# Altium PCB Embeded MCU.PcbDoc
Units mm, origin at the board's own origin, x right, y up, seen from the top; angles counter-clockwise.
Board outline 126.36 x 110.87 mm, 2 copper layers (Top Layer, Bottom Layer), stack 1.569 mm thick; 105 components, 115 nets, 450 pads, 0 vias.
Unrouted connection lines stored in the file: 300.
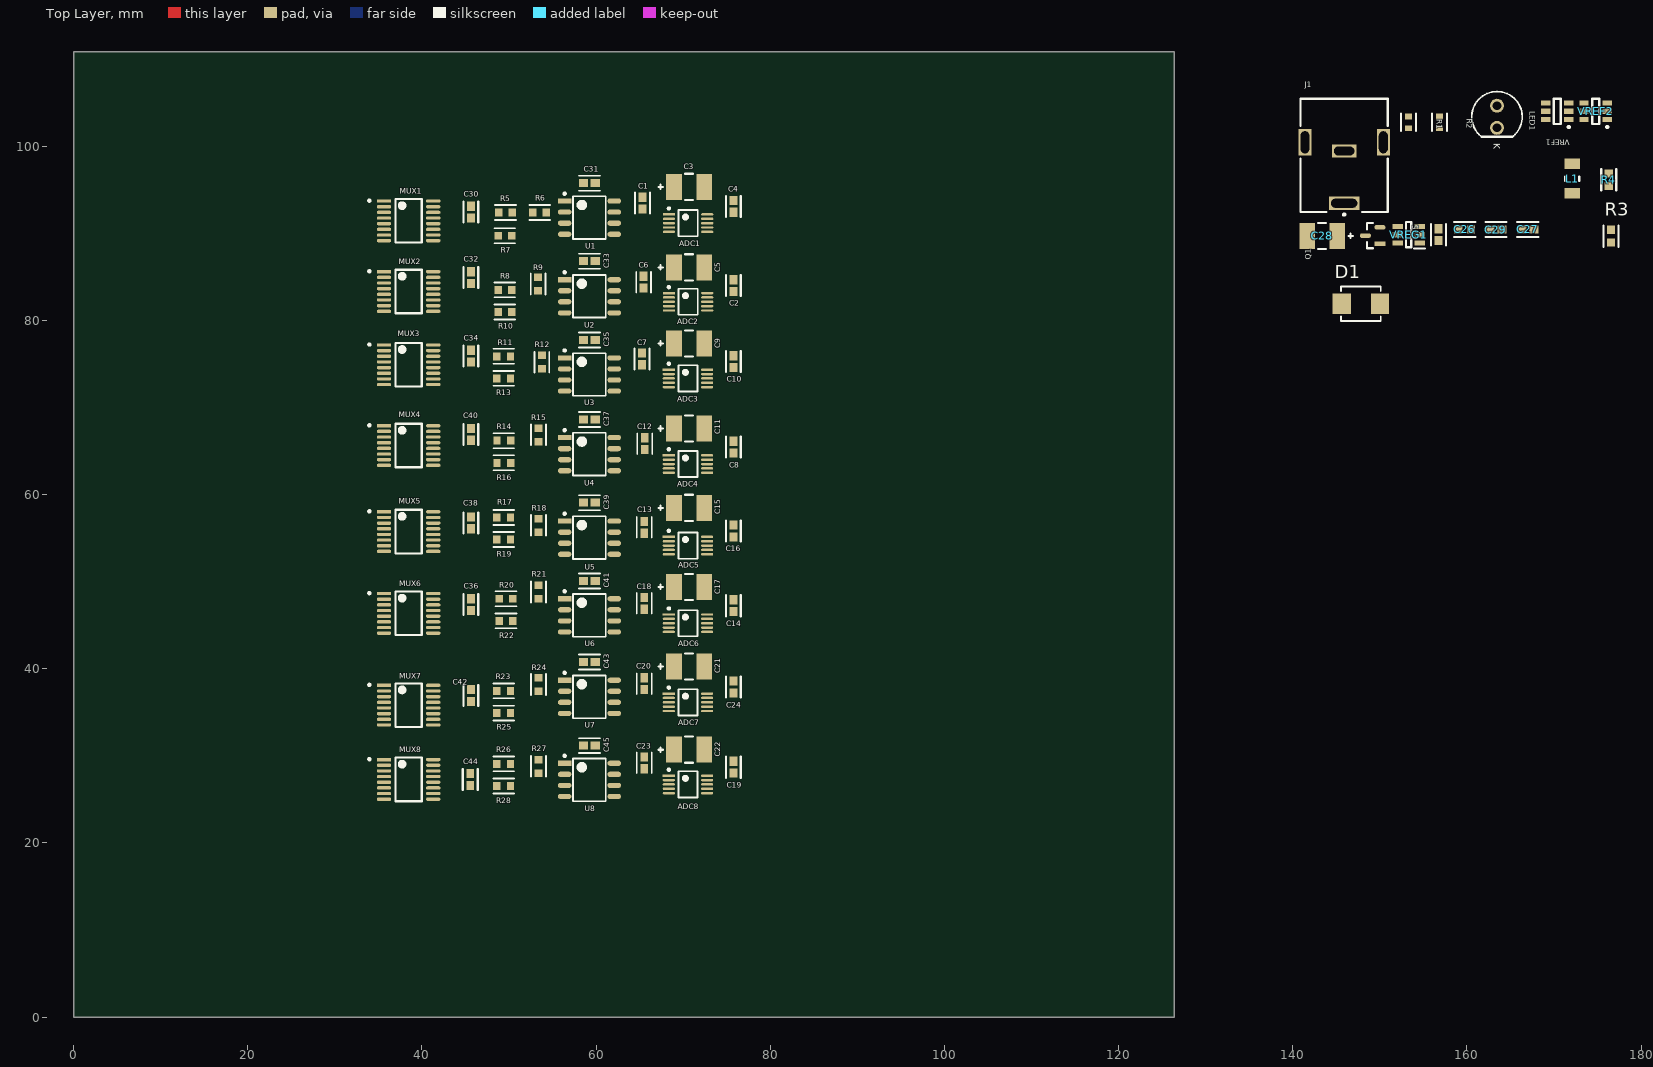
[diagram p0: Top Layer view]
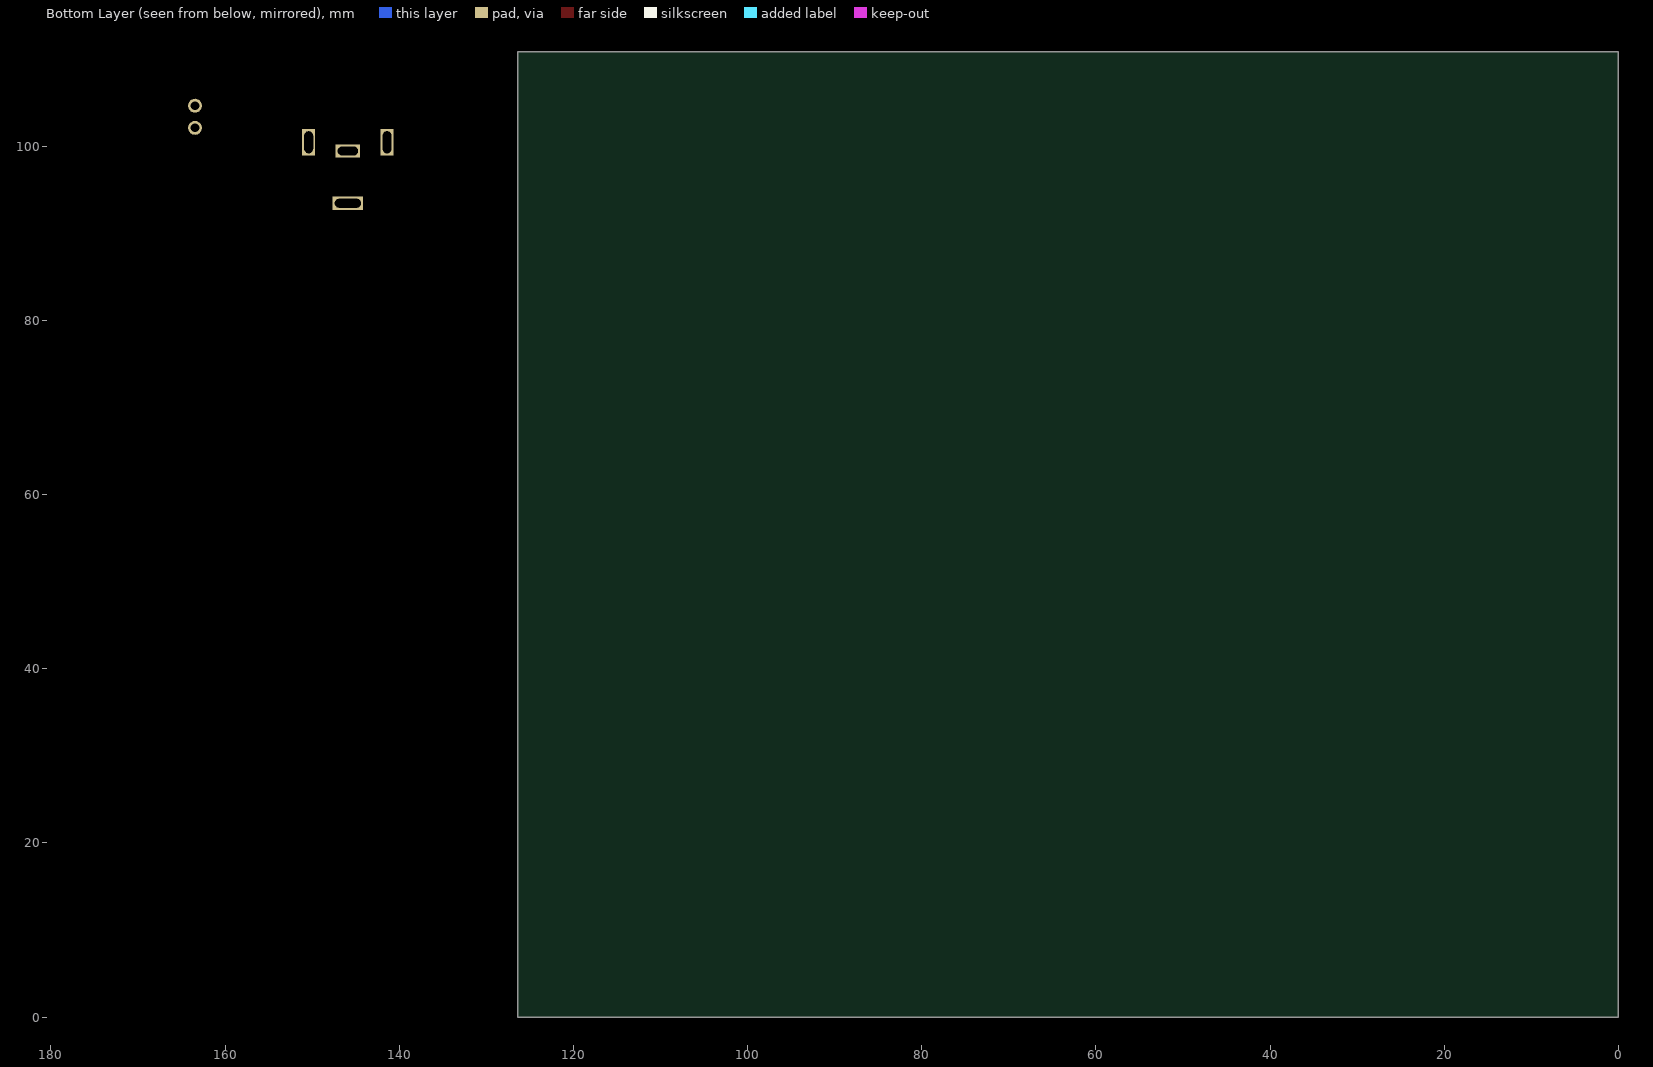
[diagram p1: Bottom Layer view, seen from below]

## Layer stack, top to bottom
Top Solder: solder mask 0.0254, SM-001, Dk 4
Top Layer: signal copper 0.035
Dielectric 1: core 1.4986, Core-043, Dk 4.3
Bottom Layer: signal copper 0.035
Bottom Solder: solder mask 0.0254, SM-001, Dk 4

## Board outline
0,0 0,110.871 126.365,110.871 126.365,0

## Design rules (kind name [scope] priority, off if disabled: settings)
BoardOutlineClearance [All] p1: gap=0.2 ignorepadtopadclearanceinfootprint=FALSE
Clearance [All] p1: gap=0.254 ignorepadtopadclearanceinfootprint=TRUE except(0.127: SMDPad-SMDPad; 0.2: Arc-SMDPad Track-SMDPad; 0.33: Arc-THPad Track-THPad; 0.5: THPad-THPad)
HoleSize [All] p1: absolutevalues=TRUE maxlimit=2.54 minlimit=0.2 maxpercent=80.000 minpercent=20.000
HoleToHoleClearance [All] p1: gap=0.5 allowstackedmicrovias=TRUE
MinimumAnnularRing [All] p1: minimumring=0.2
PolygonConnect [All] p1: connectstyle=Relief reliefconductorwidth=0.254 reliefentries=4 polygonreliefangle="90 Angle" airgapwidth=0.254
RoomDefinition "Power Supply Unit" [InComponentClass('Power Supply Unit')] p1: confinementstyle=ConfineIn formatcopy=TRUE lockcomponents=FALSE outline 138.876,108.605 138.876,60.091 186.247,60.091 186.247,108.605
RoutingVias [All] p1: holewidth=0.3 width=0.7 viastyle="Through Hole" minholewidth=0.2 minwidth=0.5 maxholewidth=0.5 maxwidth=0.9
SolderMaskExpansion [All] p1: expansion=0.102 istentingtop=FALSE
UnRoutedNet [All] p1: checkbadconnections=TRUE
Width [All] p1: maxlimit=0.5 minlimit=0.2 preferedwidth=0.3
27 further rules are at their usual default settings.

## Classes and differential pairs
component class "Weatstone bridge part I": *3 C30 C31 C32 C33 C34 C35 MUX1 MUX2 MUX3 R5 R6 R7 R8 R9 R10 R11 R12 R13 U1 U2 U3
component class "Weatstone bridge part II": *4 C36 C37 C38 C39 C40 C41 MUX4 MUX5 MUX6 R14 R15 R16 R17 R18 R19 R20 R21 R22 U4 U5 U6
component class "Weatstone bridge part III": *5 C42 C43 C44 C45 MUX7 MUX8 R23 R24 R25 R26 R27 R28 U7 U8
component class "Processing interface": *1 ADC1 ADC2 ADC3 ADC4 ADC5 ADC6 ADC7 ADC8 C1 C2 C3 C4 C5 C6 C7 C8 C9 C10 C11 C12 C13 C14 C15 C16 C17 C18 C19 C20 C21 C22 C23 C24
component class "Power Supply Unit": *2 C25 C26 C27 C28 C29 D1 J1 L1 LED1 Q1 R1 R2 R3 R4 VREF1 VREF2 VREG1

## Components (designator, comment, footprint, x,y, rotation, side; value= is the part's Value field where it differs from the comment)
ADC1 "MCP33141-10-E/MS" MCP33141-10-E/MS 70.56,91.17 r0 top
ADC2 "MCP33141-10-E/MS" MCP33141-10-E/MS 70.56,82.139 r0 top
ADC3 "MCP33141-10-E/MS" MCP33141-10-E/MS 70.552,73.343 r0 top
ADC4 "MCP33141-10-E/MS" MCP33141-10-E/MS 70.552,63.508 r0 top
ADC5 "MCP33141-10-E/MS" MCP33141-10-E/MS 70.552,54.145 r0 top
ADC6 "MCP33141-10-E/MS" MCP33141-10-E/MS 70.552,45.231 r0 top
ADC7 "MCP33141-10-E/MS" MCP33141-10-E/MS 70.552,36.147 r0 top
ADC8 "MCP33141-10-E/MS" MCP33141-10-E/MS 70.552,26.719 r0 top
C1 "CC0603KPX7R7BB105" FP-CC0603-DA-IPC_B 65.332,93.476 r270 top value=1uF
C2 "CC0603JRX7R9BB104" FP-CC0603-DA-IPC_B 75.759,84.002 r270 top value=100nF
C3 "293D106X9016B2TE3" FP-293D-B-MFG 70.679,95.337 r180 top value=10uF
C4 "CC0603JRX7R9BB104" FP-CC0603-DA-IPC_B 75.759,93.095 r90 top value=100nF
C5 "293D106X9016B2TE3" FP-293D-B-MFG 70.679,86.093 r180 top value=10uF
C6 "CC0603KPX7R7BB105" FP-CC0603-DA-IPC_B 65.459,84.388 r90 top value=1uF
C7 "CC0603KPX7R7BB105" FP-CC0603-DA-IPC_B 65.278,75.58 r270 top value=1uF
C8 "CC0603JRX7R9BB104" FP-CC0603-DA-IPC_B 75.759,65.455 r270 top value=100nF
C9 "293D106X9016B2TE3" FP-293D-B-MFG 70.679,77.358 r180 top value=10uF
C10 "CC0603JRX7R9BB104" FP-CC0603-DA-IPC_B 75.759,75.272 r90 top value=100nF
C11 "293D106X9016B2TE3" FP-293D-B-MFG 70.679,67.59 r180 top value=10uF
C12 "CC0603KPX7R7BB105" FP-CC0603-DA-IPC_B 65.586,65.845 r90 top value=1uF
C13 "CC0603KPX7R7BB105" FP-CC0603-DA-IPC_B 65.532,56.241 r270 top value=1uF
C14 "CC0603JRX7R9BB104" FP-CC0603-DA-IPC_B 75.759,47.244 r270 top value=100nF
C15 "293D106X9016B2TE3" FP-293D-B-MFG 70.679,58.473 r180 top value=10uF
C16 "CC0603JRX7R9BB104" FP-CC0603-DA-IPC_B 75.759,55.822 r90 top value=100nF
C17 "293D106X9016B2TE3" FP-293D-B-MFG 70.679,49.393 r180 top value=10uF
C18 "CC0603KPX7R7BB105" FP-CC0603-DA-IPC_B 65.532,47.514 r90 top value=1uF
C19 "CC0603JRX7R9BB104" FP-CC0603-DA-IPC_B 75.759,28.694 r270 top value=100nF
C20 "CC0603KPX7R7BB105" FP-CC0603-DA-IPC_B 65.532,38.287 r270 top value=1uF
C21 "293D106X9016B2TE3" FP-293D-B-MFG 70.679,40.259 r180 top value=10uF
C22 "293D106X9016B2TE3" FP-293D-B-MFG 70.679,30.71 r180 top value=10uF
C23 "CC0603KPX7R7BB105" FP-CC0603-DA-IPC_B 65.532,29.194 r90 top value=1uF
C24 "CC0603JRX7R9BB104" FP-CC0603-DA-IPC_B 75.759,37.906 r90 top value=100nF
C25 "CC0603KRX7R5BB225" FP-CC0603-DA-IPC_B 156.725,89.844 r90 top value=2.2uF
C26 "GRM188R71E224KA88D" FP-GRM188-0_1-e0_2_0_5-IPC_B 159.745,90.444 r180 top value=220nF
C27 "CC0603JRX7R9BB104" FP-CC0603-DA-IPC_B 166.985,90.444 r0 top value=100nF
C28 "293D106X9016B2TE3" FP-293D-B-MFG 143.372,89.7 r0 top value=10uF
C29 "CC0603KRX7R5BB225" FP-CC0603-DA-IPC_B 163.329,90.437 r180 top value=2.2uF
C30 "CC0603JRX7R9BB104" FP-CC0603-DA-IPC_B 45.619,92.437 r270 top value=100nF
C31 "CC0603JRX7R9BB104" FP-CC0603-DA-IPC_B 59.236,95.76 r0 top value=100nF
C32 "CC0603JRX7R9BB104" FP-CC0603-DA-IPC_B 45.619,84.921 r270 top value=100nF
C33 "CC0603JRX7R9BB104" FP-CC0603-DA-IPC_B 59.236,86.801 r0 top value=100nF
C34 "CC0603JRX7R9BB104" FP-CC0603-DA-IPC_B 45.619,75.91 r270 top value=100nF
C35 "CC0603JRX7R9BB104" FP-CC0603-DA-IPC_B 59.236,77.756 r0 top value=100nF
C36 "CC0603JRX7R9BB104" FP-CC0603-DA-IPC_B 45.619,47.364 r270 top value=100nF
C37 "CC0603JRX7R9BB104" FP-CC0603-DA-IPC_B 59.236,68.631 r0 top value=100nF
C38 "CC0603JRX7R9BB104" FP-CC0603-DA-IPC_B 45.619,56.755 r270 top value=100nF
C39 "CC0603JRX7R9BB104" FP-CC0603-DA-IPC_B 59.235,59.069 r0 top value=100nF
C40 "CC0603JRX7R9BB104" FP-CC0603-DA-IPC_B 45.619,66.913 r270 top value=100nF
C41 "CC0603JRX7R9BB104" FP-CC0603-DA-IPC_B 59.235,50.072 r0 top value=100nF
C42 "CC0603JRX7R9BB104" FP-CC0603-DA-IPC_B 45.619,36.933 r270 top value=100nF
C43 "CC0603JRX7R9BB104" FP-CC0603-DA-IPC_B 59.235,40.773 r0 top value=100nF
C44 "CC0603JRX7R9BB104" FP-CC0603-DA-IPC_B 45.55,27.285 r270 top value=100nF
C45 "CC0603JRX7R9BB104" FP-CC0603-DA-IPC_B 59.235,31.18 r0 top value=100nF
D1 "SMBJ20CA" FP-SMBJ-CA-MFG 147.828,81.915 r0 top
J1 "PJ-063AH" CUI-PJ-063AH_V 145.898,99.458 r90 top
L1 "ILSB1206ER4R7K" INDC3216X14N 172.092,96.279 r270 top value=4.7uH
LED1 "151053GS03000" "Type 5mm" 163.452,103.386 r270 top
MUX1 "TMUX1208PWR" FP-PW0016A-IPC_B 38.473,91.435 r0 top
MUX2 "TMUX1208PWR" FP-PW0016A-IPC_B 38.473,83.323 r0 top
MUX3 "TMUX1208PWR" FP-PW0016A-IPC_B 38.473,74.908 r0 top
MUX4 "TMUX1208PWR" FP-PW0016A-IPC_B 38.473,65.633 r0 top
MUX5 "TMUX1208PWR" FP-PW0016A-IPC_B 38.473,55.753 r0 top
MUX6 "TMUX1208PWR" FP-PW0016A-IPC_B 38.473,46.362 r0 top
MUX7 "TMUX1208PWR" FP-PW0016A-IPC_B 38.473,35.822 r0 top
MUX8 "TMUX1208PWR" FP-PW0016A-IPC_B 38.473,27.295 r0 top
Q1 "IRLML9303TRPBF" FP-Micro3-IPC_C 149.177,89.74 r180 top
R1 "AC0603FR-072K4L" FP-AC0603-IPC_C 153.287,102.754 r270 top value=2.4kR
R2 "AC0603FR-075K1L" FP-AC0603-IPC_C 156.853,102.754 r270 top value=5.1kR
R3 "CRCW060322K1FKEA" CRCW060322K1FKEA-Footprint-2 176.537,89.675 r270 top value=22K1
R4 "CRCW060388K7FKEB" FP-CRCW0603-e3-IPC_B 176.283,96.152 r90 top value=88K7
R5 "RT0603BRD0710KL" FP-RT0603-IPC_B 49.584,92.39 r0 top value=10K
R6 "RT0603BRD0710KL" FP-RT0603-IPC_B 53.521,92.39 r0 top value=10K
R7 "RT0603BRD0710KL" FP-RT0603-IPC_B 49.522,89.726 r0 top value=10K
R8 "RT0603BRD0710KL" FP-RT0603-IPC_B 49.522,83.509 r0 top value=10K
R9 "RT0603BRD0710KL" FP-RT0603-IPC_B 53.34,84.186 r90 top value=10K
R10 "RT0603BRD0710KL" FP-RT0603-IPC_B 49.522,80.969 r0 top value=10K
R11 "RT0603BRD0710KL" FP-RT0603-IPC_B 49.395,75.883 r0 top value=10K
R12 "RT0603BRD0710KL" FP-RT0603-IPC_B 53.775,75.206 r90 top value=10K
R13 "RT0603BRD0710KL" FP-RT0603-IPC_B 49.395,73.343 r0 top value=10K
R14 "RT0603BRD0710KL" FP-RT0603-IPC_B 49.396,66.19 r0 top value=10K
R15 "RT0603BRD0710KL" FP-RT0603-IPC_B 53.385,66.866 r90 top value=10K
R16 "RT0603BRD0710KL" FP-RT0603-IPC_B 49.396,63.65 r0 top value=10K
R17 "RT0603BRD0710KL" FP-RT0603-IPC_B 49.395,57.378 r0 top value=10K
R18 "RT0603BRD0710KL" FP-RT0603-IPC_B 53.393,56.473 r90 top value=10K
R19 "RT0603BRD0710KL" FP-RT0603-IPC_B 49.395,54.838 r0 top value=10K
R20 "RT0603BRD0710KL" FP-RT0603-IPC_B 49.642,48.041 r0 top value=10K
R21 "RT0603BRD0710KL" FP-RT0603-IPC_B 53.393,48.817 r90 top value=10K
R22 "RT0603BRD0710KL" FP-RT0603-IPC_B 49.642,45.501 r0 top value=10K
R23 "RT0603BRD0710KL" FP-RT0603-IPC_B 49.395,37.458 r0 top value=10K
R24 "RT0603BRD0710KL" FP-RT0603-IPC_B 53.393,38.194 r90 top value=10K
R25 "RT0603BRD0710KL" FP-RT0603-IPC_B 49.395,34.902 r0 top value=10K
R26 "RT0603BRD0710KL" FP-RT0603-IPC_B 49.395,29.074 r0 top value=10K
R27 "RT0603BRD0710KL" FP-RT0603-IPC_B 53.393,28.794 r90 top value=10K
R28 "RT0603BRD0710KL" FP-RT0603-IPC_B 49.395,26.534 r0 top value=10K
U1 "MCP6N11-100E/SN" MCP6N11-100E/SN 59.236,91.805 r0 top
U2 "MCP6N11-100E/SN" MCP6N11-100E/SN 59.236,82.774 r0 top
U3 "MCP6N11-100E/SN" MCP6N11-100E/SN 59.236,73.794 r0 top
U4 "MCP6N11-100E/SN" MCP6N11-100E/SN 59.236,64.643 r0 top
U5 "MCP6N11-100E/SN" MCP6N11-100E/SN 59.235,55.05 r0 top
U6 "MCP6N11-100E/SN" MCP6N11-100E/SN 59.235,46.136 r0 top
U7 "MCP6N11-100E/SN" MCP6N11-100E/SN 59.235,36.782 r0 top
U8 "MCP6N11-100E/SN" MCP6N11-100E/SN 59.235,27.243 r0 top
VREF1 "MCP1501T-33E/CHY" SOT95P280X118-6N 170.372,104.008 r180 top
VREF2 "MCP1501T-18E/CHY" MCP1501T-18E/CHY 174.784,104.008 r180 top
VREG1 "LMR50410YFQDBVRQ1" SOT95P280X145-6N 153.309,89.85 r180 top

## Footprints (in the part's own frame and the unit in brackets; to place one, negate y for a bottom-side part, rotate by r counter-clockwise, add the part's x,y. Pads: shape width x height; smd on the part's side, far side on the other; paste and mask are expansions set on the pad)
CRCW060322K1FKEA-Footprint-2 [mm]
  rect 0.958x0.912 smd paste+0 mask+0: 1(-0.727,0) 2(0.727,0)
  silkscreen extent -1.21,-0.86 1.21,0.86, body extent -1.46,-0.71 1.46,0.71, height 0.25
CUI-PJ-063AH_V [mm] "THD, 2-Leads, Body 13x10mm, Height 9mm"
  rect 1.5x3.5 hole 1 slot 3 at 90 deg: 1(-6,0)
  rect 1.5x2.8 hole 1 slot 2.3 at 90 deg: 2(0,0)
  rect 3x1.5 hole 1 slot 2.5 at 0 deg: 3(1,4.5) 4(1,-4.5)
  round 1.4 hole 1.7 unplated: 5(3,0)
  silkscreen extent -7.42,-5 6,5, body extent -7,-5.15 6,5.15, height 9
FP-293D-B-MFG [mm]
  rect 1.8x3 smd paste+0 mask+0: 1(-1.725,0) 2(1.725,0)
  silkscreen extent -0.45,-1.5 3.52,1.5, body extent -2.73,-1.6 2.73,1.6, height 0.25
FP-AC0603-IPC_C [mm]
  rect 0.659x0.812 smd paste+0 mask+0: 1(-0.677,0) 2(0.677,0)
  silkscreen extent -1.01,-0.85 1.01,0.85, body extent -1.11,-0.55 1.11,0.55, height 0.25
FP-CC0603-DA-IPC_B [mm]
  rect 1.058x0.912 smd paste+0 mask+0: 1(-0.677,0) 2(0.677,0)
  silkscreen extent -1.21,-0.86 1.21,0.86, body extent -1.46,-0.71 1.46,0.71, height 0.25
FP-CRCW0603-e3-IPC_B [mm]
  rect 0.935x0.962 smd paste+0 mask+0: 1(-0.715,0) 2(0.715,0)
  silkscreen extent -1.21,-0.86 1.21,0.86, body extent -1.43,-0.73 1.43,0.73, height 0.25
FP-GRM188-0_1-e0_2_0_5-IPC_B [mm]
  rect 0.959x0.912 smd paste+0 mask+0: 1(-0.727,0) 2(0.727,0)
  silkscreen extent -1.21,-0.86 1.21,0.86, body extent -1.46,-0.71 1.46,0.71, height 0.25
FP-Micro3-IPC_C [mm]
  rect 1.274x0.532 smd paste+0 mask+0: 1(-0.835,0.95)
  rrect100% 1.274x0.532 smd paste+0 mask+0: 2(-0.835,-0.95) 3(0.835,0)
  silkscreen extent 0,-1.46 0.65,1.46, body extent -1.57,-1.56 1.57,1.56, height 0.25
FP-PW0016A-IPC_B [mm]
  rect 1.655x0.381 smd paste+0 mask+0: 1(-2.825,2.275)
  rrect100% 1.655x0.381 smd paste+0 mask+0: 2(-2.825,1.625) 3(-2.825,0.975) 4(-2.825,0.325) 5(-2.825,-0.325) 6(-2.825,-0.975) 7(-2.825,-1.625) 8(-2.825,-2.275) 9(2.825,-2.275) 10(2.825,-1.625) 11(2.825,-0.975) 12(2.825,-0.325) 13(2.825,0.325) 14(2.825,0.975) 15(2.825,1.625) 16(2.825,2.275)
  silkscreen extent -4.63,-2.5 1.5,2.5, body extent -3.9,-2.75 3.9,2.75, height 0.25
FP-RT0603-IPC_B [mm]
  rect 0.859x0.912 smd paste+0 mask+0: 1(-0.777,0) 2(0.777,0)
  silkscreen extent -1.21,-0.86 1.21,0.86, body extent -1.46,-0.71 1.46,0.71, height 0.25
FP-SMBJ-CA-MFG [mm]
  rect 2.1x2.4 smd paste+0 mask+0: 1(-2.2,0) 2(2.2,0)
  silkscreen extent -2.28,-1.97 2.28,1.97, body extent -2.72,-2.07 2.72,2.07, height 0.25
INDC3216X14N [mm] "Chip Inductor, 2-Leads, Body 3,20x1,60mm, IPC Medium Density"
  rect 1.2x1.8 smd: 1(-1.7,0) 2(1.7,0)
  silkscreen extent -0.25,-0.8 0.25,0.8, body extent -1.7,-0.9 1.7,0.9, height 1.4
MCP6N11-100E/SN [mm] "SOIC, 8-Leads, Body 4,90x3,90mm, Pitch 1,27mm, IPC Medium Density"
  rect 1.55x0.6 smd: 1(-2.85,1.905)
  oval 1.55x0.6 smd: 2(-2.85,0.635) 3(-2.85,-0.635) 4(-2.85,-1.905) 5(2.85,-1.905) 6(2.85,-0.635) 7(2.85,0.635) 8(2.85,1.905)
  silkscreen extent -2.97,-2.45 1.88,2.88, body extent -3,-2.45 3,2.45, height 1.75
MCP1501T-18E/CHY [mm] "SOT23, 6-Leads, Body 2,90x2,80mm, Pitch 0,95mm, IPC Medium Density"
  rect 1.05x0.6 smd: 1(-1.325,0.95) 2(-1.325,0) 3(-1.325,-0.95) 4(1.325,-0.95) 5(1.325,0) 6(1.325,0.95)
  silkscreen extent -1.45,-1.45 0.4,1.92, body extent -1.4,-1.45 1.4,1.45, height 1.17
MCP33141-10-E/MS [mm] "TSSOP, 10-Leads, Body 3,00x3,00mm, Pitch 0,50mm, IPC Low Density"
  rect 1.4x0.28 smd: 1(-2.2,1)
  oval 1.4x0.28 smd: 2(-2.2,0.5) 3(-2.2,0) 4(-2.2,-0.5) 5(-2.2,-1) 6(2.2,-1) 7(2.2,-0.5) 8(2.2,0) 9(2.2,0.5) 10(2.2,1)
  silkscreen extent -2.32,-1.5 1.1,1.81, body extent -2.45,-1.5 2.45,1.5, height 1.1
SOT95P280X118-6N [mm] "SOT23, 6-Leads, Body 2,90x2,80mm, Pitch 0,95mm, IPC Medium Density"
  rect 1.05x0.6 smd: 1(-1.325,0.95) 2(-1.325,0) 3(-1.325,-0.95) 4(1.325,-0.95) 5(1.325,0) 6(1.325,0.95)
  silkscreen extent -1.45,-1.45 0.4,1.92, body extent -1.4,-1.45 1.4,1.45, height 1.17
SOT95P280X145-6N [mm]
  rect 1.2x0.6 smd: 1(-1.25,0.95) 2(-1.25,0) 3(-1.25,-0.95) 4(1.25,-0.95) 5(1.25,0) 6(1.25,0.95)
  silkscreen extent -1.85,-1.45 0.3,1.6, body extent -1.4,-1.45 1.4,1.45, height 1.45
"Type 5mm" [mm] "THT, LED-5mm, 2pin- Body 5.8mm"
  round 1.6 hole 1: 1(1.27,0) 2(-1.27,0)
  silkscreen extent -2.9,-2.9 2.29,2.9, body extent -2.9,-2.9 2.5,2.9, height 11.7

## Part data
ADC1 ADC2 ADC3 ADC4 ADC5 ADC6 ADC7 ADC8: library part CMP-020-00028-10, "ADC Single SAR 1Msps 12-bit Serial Microwire/SPI 10-Pin MSOP Tray", Architecture=SAR, Data Interface=SPI, Resolution="12 Bits", Sampling rate=1M
C1 C6 C7 C12 C13 C18 C20 C23: library part CMP-001-00101-1, "0603 1 uF 16 V ±10 % Tolerance X7R SMT Multilayer Ceramic Capacitor", Case Code (Imperial)=0603, Case Code (Metric)=1608, Dielectric=X7R, Max Operating Temperature=125°C, Min Operating Temperature=-55°C, Resistor Type=Ceramic, Tolerance=10%, Voltage Rating (DC)=16V, Case/Package=0603, Construction=Flat, Depth=0.8mm, Halogen Free="Halogen Free", Height=0.8mm, Lead Free="Lead Free", Length=1.6mm, Mounting Technology="Surface Mount", Packaging="Tape and Reel", Radiation Hardening=No, RoHS Compliant=Yes, Termination=SMD/SMT, Weight=7.1E-05oz
C2 C4 C8 C10 C14 C16 C19 C24 C27 C30 C31 C32 C33 C34 C35 C36 C37 C38 C39 C40 C41 C42 C43 C44 C45: library part CMP-001-00097-1, "0603 0.1 uF 50 V ±5 % Tolerance X7R SMT Multilayer Ceramic Capacitor", Case Code (Imperial)=0603, Case Code (Metric)=1608, Dielectric=X7R, Max Operating Temperature=125°C, Min Operating Temperature=-55°C, Resistor Type=Ceramic, Tolerance=5%, Voltage Rating=50V, Case/Package=0603, Construction=Flat, Depth=0.8mm, Halogen Free="Halogen Free", Height=0.8mm, Lead Free="Lead Free", Length=0.063inch, Mounting Technology="Surface Mount", Packaging="Tape and Reel", Pins=2, Radiation Hardening=No, RoHS Compliant=Yes, Series=CC, Termination=SMD/SMT, Thickness=0.035inch, Voltage Rating (DC)=50V, Weight=7.1E-05oz, Width=0.031inch
C3 C5 C9 C11 C15 C17 C21 C22 C28: library part CMP-001-00090-1, "Cap Tant Solid 10uF 16V B CASE 10% (3.5 X 2.8 X 1.9mm) Inward L SMD 3528-21 2 Ohm 125C T/R", Case Code (Imperial)=1411, Case Code (Metric)=3528, Dielectric Material=Tantalum, ESR (Equivalent Series Resistance)=2R, Leakage Current=1.6uA, Max Operating Temperature=125°C, Min Operating Temperature=-55°C, Package Quantity=2000, Ripple Current=160mA, Tolerance=10%, Voltage=16V, Case/Package=1411, Construction=Flat, Depth=2.8mm, Dissipation Factor=6%, Features="General Purpose", Height=1.9mm, Height - Seated (Max)=0.083inch, Lead Free="Lead Free", Length=3.5mm, Mounting Technology="Surface Mount,PCB", Packaging="Tape and Reel", Polarity=Polar, Q Factor=6, Radiation Hardening=No, RoHS Compliant=Yes, Series="TANTAMOUNT®, 293D", Termination=SMD/SMT, Voltage Rating=16V, Voltage Rating (DC)=16V, Width=1.9mm
C25 C29: library part CMP-001-00098-1, "MLCC- CAPACITANCE 225", Case Code (Imperial)=0603, Case Code (Metric)=1608, Dielectric=X7R, Max Operating Temperature=125°C, Min Operating Temperature=-55°C, Resistor Type=Ceramic, Tolerance=10%, Voltage Rating=6.3V, Case/Package=0603, Construction=Flat, Depth=0.8mm, Halogen Free="Halogen Free", Height=0.8mm, Lead Free="Lead Free", Length=0.063inch, Mounting Technology="Surface Mount", Packaging="Tape and Reel", Radiation Hardening=No, RoHS Compliant=Yes, Series=CC, Termination=SMD/SMT, Thickness=0.035inch, Voltage Rating (DC)=6.3V, Weight=7.1E-05oz, Width=0.031inch
C26: library part CMP-001-00102-1, "0603 0.22 uF 25 V ±10% Tolerance X7R SMT Multilayer Ceramic Capacitor", Case Code (Imperial)=0603, Case Code (Metric)=1608, Dielectric=X7R, Max Operating Temperature=125°C, Min Operating Temperature=-55°C, Package Quantity=1, Tolerance=10%, Voltage=25V, Case/Package=0603, Construction=Flat, Depth=0.8mm, Height=0.8mm, Lead Free="Lead Free", Length=1.6mm, Material=Ceramic, Mounting Technology="Surface Mount", Packaging="Tape and Reel", Pins=2, Radiation Hardening=No, Reach SVHC Compliant=Yes, RoHS Compliant=Yes, Series=GRM, Termination=SMD/SMT, Thickness=0.035inch, Voltage Rating=25V, Voltage Rating (DC)=25V, Width=0.031inch
D1: library part CMP-004-00035-3, "Dio Tvs Vwm 20V 600W Bidir Smb Rohs Compliant: Yes", Breakdown Voltage=25.5V, Case/Package=DO-214AA, Clamping Voltage=32.4V, Leakage Current=5uA, Max Operating Temperature=150°C, Max Power Dissipation=600W, Max Surge Current=100A, Min Breakdown Voltage=22.2V, Min Operating Temperature=-55°C, Operating Supply Voltage=3.5V, Package Quantity=1, Peak Pulse Current=18.6A, Power Line Protection=No, Resistor Type=Zener, Reverse Standoff Voltage=20V, Test Current=1mA, Diode Type=ZENER, Direction=Bidirectional, Element Configuration=Single, Max Breakdown Voltage=25.5V, Max Reverse Leakage Current=5uA, Mounting Technology="Surface Mount", Number of Bidirectional Channels=1, Number of Channels=1, Number of Elements=1, Packaging="Tape and Reel", Peak Pulse Power=600W, Pins=2, Polarity=Bidirectional, Radiation Hardening=No, Reach SVHC Compliant=Yes, Reverse Breakdown Voltage=22.2V, RoHS Compliant=Yes, Series=SMBJ, Termination=SMD/SMT
J1: library part CMP-002-00079-1, "2.0 x 6.5 mm, 8.0 A, Horizontal, Through Hole, Shielded, Kinked Pins, Dc Power Jack Connector", Current Rating=8A, Flammability Rating="UL94 V-0", Housing Color=Black, Insulation Resistance=100MR, Max Operating Temperature=85°C, Min Operating Temperature=-25°C, Package Quantity=500, Voltage Rating=24V, Connector Type=Jack, Contact Gender=Male, Contact Material=Copper, Contact Plating=Nickel, Gender=Male, Housing Material=Thermoplastic, Lead Free="Lead Free", Mounting Technology="Through Hole", Number of Conductors=2, Orientation=Horizontal, RoHS Compliant=Yes, Series=-, Shielding=Shielded, Termination="Through Hole"
L1: library part CMP-006-00022-1, "Inductor RF Chip Shielded Multi-Layer 4.7uH 10% 10MHz 45Q-Factor 50mA 900mOhm DCR 1206 T/R", Case Code (Imperial)=1206, Case Code (Metric)=3216, Current Rating=50mA, DC Resistance (DCR)=900mR, Max Operating Temperature=125°C, Min Operating Temperature=-55°C, Package Quantity=3000, Self Resonant Frequency=41MHz, Test Frequency=10MHz, Tolerance=10%, Case/Package=1206, Core Material=Ferrite, Depth=1.8mm, Height=1.1mm, Height - Seated (Max)=0.055inch, Lead Free="Lead Free", Length=0.126inch, Max DC Current=50mA, Mounting Technology="Surface Mount", Packaging="Tape and Reel", Q Factor=45, Radiation Hardening=No, RoHS Compliant=Yes, Series=ILSB-1206, Shielding=Shielded, Termination=SMD/SMT, Weight=0.000353oz, Width=1.6mm
LED1: library part CMP-007-00044-1, "Led, Green, T-1 3/4 (5Mm), 522 Nm, 3.4 V, 30 Ma, 10 Cd Rohs Compliant: Yes", Case/Package=Radial, Color=Green, Forward Current=30mA, Forward Voltage=3.4V, Lens Color=Colorless, Max Operating Temperature=85°C, Min Operating Temperature=-40°C, Package Quantity=1, Test Current=20mA, Dominant Wavelength=522nm, Height=8.85mm, Lens Size=5mm, Lens Style=Round,Domed,Circular, Lens Transparency=Clear, Luminous Intensity=10000mcd, Mounting Technology="Through Hole", Packaging=Bulk, RoHS Compliant=Yes, Series=WL-TMRW, Viewing Angle=30°, Wavelength=522nm
MUX1 MUX2 MUX3 MUX4 MUX5 MUX6 MUX7 MUX8: library part CMP-015-00012-1, "5-V, 8: 1, 1-channel general-purpose analog multiplexer with 1.8-V input logic 16-TSSOP -40 to 125", RoHS Compliant=Yes
Q1: library part CMP-013-00037-1, "-30V Single P-Channel HEXFET Power MOSFET in a Micro3 package, SOT23-3, RoHS", Case/Package=SOT-23, Continuous Drain Current (ID)=2.3A, Drain to Source Resistance=270mR, Drain to Source Voltage (Vdss)=-30V, Gate to Source Voltage (Vgs)=20V, Input Capacitance=160pF, Max Operating Temperature=150°C, Max Power Dissipation=1.25W, Min Operating Temperature=-55°C, Threshold Voltage=-1.3V, Element Configuration=Single, Halogen Free="Halogen Free", Height=0.04inch, Lead Free="Lead Free", Length=0.119inch, Max Dual Supply Voltage=-30V, Mounting Technology="Surface Mount", Packaging="Cut Tape", Pins=3, Power Dissipation=1.25W, Rds On Max=165mR, Reach SVHC Compliant=Yes, Rise Time=14ns, RoHS Compliant=Yes, Series=HEXFET®, Turn-Off Delay Time=9ns, Turn-On Delay Time=7.5ns, Width=0.055inch
R1: library part CMP-009-00195-2, "Res Thick Film 0603 2.4K Ohm 1% 0.1W(1/10W) ±100ppm/C Pad SMD Automotive T/R", Case Code (Imperial)=0603, Case Code (Metric)=1608, Max Operating Temperature=155°C, Max Power Dissipation=100mW, Min Operating Temperature=-55°C, Ratings=AEC-Q200, Resistor Type="Thick Film", Temperature Coefficient=100ppm/°C, Tolerance=1%, Voltage Rating=50V, Case/Package=0603, Features="Moisture Resistant,Automotive AEC-Q200", Height=0.022inch, Length=0.063inch, Number of Terminations=2, Packaging="Tape and Reel", Power Rating=100mW, RoHS Compliant=Yes, Series=AC, Termination=SMD/SMT, Weight=7.1E-05oz, Width=0.8mm
R2: library part CMP-009-00196-1, "Res Thick Film 0603 5.1K Ohm 1% 1/10W ±100ppm/°C Molded SMD Paper T/R", Case Code (Imperial)=0603, Case Code (Metric)=1608, Max Operating Temperature=155°C, Max Power Dissipation=100mW, Min Operating Temperature=-55°C, Ratings=AEC-Q200, Resistor Type="Thick Film", Temperature Coefficient=100ppm/°C, Tolerance=1%, Voltage Rating=50V, Case/Package=0603, Features="Moisture Resistant,Automotive AEC-Q200", Height=0.45mm, Length=1.6mm, Number of Terminations=2, Packaging="Tape and Reel", Power Rating=100mW, RoHS Compliant=Yes, Series=AC, Termination=SMD/SMT, Weight=7.1E-05oz, Width=0.8mm
R3: library part CMP-009-00200-2, "Res Thick Film 0603 22.1K Ohm 1% 1/10W ±100ppm/°C Molded SMD SMD Paper T/R", Case Code (Imperial)=0603, Case Code (Metric)=1608, Max Operating Temperature=155°C, Max Power Dissipation=100mW, Min Operating Temperature=-55°C, Package Quantity=10, Ratings=AEC-Q200, Resistance Tolerance=1%, Resistor Type="Thick Film", Temperature Coefficient=100ppm/°C, Voltage Rating=75V, Case/Package=0603, Construction=Rectangular, Contact Plating=Tin, Depth=0.85mm, Features="Automotive AEC-Q200", Height=0.45mm, Lead Free="Lead Free", Length=1.55mm, Military Standard=Not, Mounting Technology="Surface Mount", Number of Terminations=2, Packaging="Tape and Reel", Power Rating=100mW, Radiation Hardening=No, RoHS Compliant=Yes, Series=CRCW, Technology="THICK FILM", Termination=SMD/SMT, Tolerance=1%, Voltage Rating (DC)=75V, Weight=7.1E-05oz, Width=0.033inch
R4: library part CMP-009-00199-2, "D11/CRCW0603 100 88K7 1% ET5 e3", Case Code (Imperial)=0603, Case Code (Metric)=1608, Max Operating Temperature=155°C, Max Power Dissipation=100mW, Min Operating Temperature=-55°C, Package Quantity=10000, Resistor Type="Thick Film", Temperature Coefficient=100ppm/°C, Tolerance=1%, Voltage Rating=75V, Case/Package=0603, Construction=Rectangular, Depth=0.85mm, Features="Automotive AEC-Q200", Height=0.02inch, Lead Free="Lead Free", Length=0.061inch, Military Standard=Not, Number of Terminations=2, Packaging="Tape and Reel", Power Rating=100mW, RoHS Compliant=Yes, Series=CRCW, Termination=SMD/SMT, Weight=7.1E-05oz, Width=0.85mm
R5 R6 R7 R8 R9 R10 R11 R12 R13 R14 R15 R16 R17 R18 R19 R20 R21 R22 R23 R24 R25 R26 R27 R28: library part CMP-009-00178-1, "Res High precision Thin Film 0603 10K Ohm 0.1% 1/10W ±25ppm/°C Molded SMD Paper T/R", Case Code (Imperial)=0603, Case Code (Metric)=1608, Max Operating Temperature=155°C, Max Power Dissipation=100mW, Min Operating Temperature=-55°C, Package Quantity=5000, Resistor Type="Thin Film", Temperature Coefficient=25ppm/°C, Voltage Rating=75V, Case/Package=0603, Construction=Rectangular, Depth=0.8mm, Features="Moisture Resistant", Height=0.022inch, Lead Free="Lead Free", Length=0.063inch, Military Standard=Not, Number of Terminations=2, Packaging="Tape and Reel", Power Rating=100mW, RoHS Compliant=Yes, Series=RT, Technology="THIN FILM", Termination=SMD/SMT, Voltage Rating (DC)=75V, Weight=7.1E-05oz, Width=0.8mm, Working Voltage=75V
U1 U2 U3 U4 U5 U6 U7 U8: library part CMP-014-00010-7, "MCP6N11 Series Single Channel 500 KHz 5.5 V Instrumentation Amplifier - SOIC-8", Case/Package=SOIC, Input Bias Current=10pA, Input Offset Voltage (Vos)=350uV, Max Operating Temperature=125°C, Max Supply Current=800uA, Max Supply Voltage=5.5V, Min Operating Temperature=-40°C, Min Supply Voltage=1.8V, Package Quantity=100, Power Supply Rejection Ratio (PSRR)=86dB, Bandwidth=500kHz, Common Mode Rejection Ratio=86dB, Gain Bandwidth Product=35MHz, Height=1.25mm, Input Offset Voltage-Max=350uV, Lead Free="Lead Free", Length=4.9mm, Mounting Technology="Surface Mount", Nominal Supply Current=800uA, Number of Amplifiers=1, Number of Channels=1, Number of Circuits=1, Number of Elements=2, Packaging=Rail/Tube, Pins=8, Radiation Hardening=No, Reach SVHC Compliant=Yes, RoHS Compliant=Yes, Slew Rate=6V/µs, Slew Rate-Nom=9V/µs, Supply Current=800uA, Unity Gain Bandwidth Product=35MHz, Width=3.9mm
VREF1: library part CMP-019-00066-2, "V-Ref Precision 3.3V 20mA 6-Pin SOT-23 T/R", Case/Package=SOT-23-6, Max Operating Temperature=125°C, Min Operating Temperature=-40°C, Min Output Voltage=3.3V, Operating Supply Current=550uA, Output Current=20mA, Temperature Coefficient=50ppm/°C, Tolerance=0.08%, Mounting Technology="Surface Mount", Output Type=Fixed, Packaging="Cut Tape", Reference Type=Series, RoHS Compliant=Yes, Series=-
VREF2: library part CMP-019-00064-2, "MCP1501 Series 1.8 V 20 mA High Precision Buffered Voltage Reference SOT-23-6", Case/Package=SOT-23-6, Max Operating Temperature=125°C, Min Operating Temperature=-40°C, Min Output Voltage=1.8V, Operating Supply Current=550uA, Output Current=20mA, Temperature Coefficient=50ppm/°C, Tolerance=0.08%, Mounting Technology="Surface Mount", Output Type=Fixed, Packaging="Cut Tape", Reference Type=Series, RoHS Compliant=Yes, Series=-
VREG1: "Power Supply", Manufacturer_Name="Texas Instruments", Mouser Part Number=595-MR50410YFQDBVRQ1, Supplier Part Number 1=296-LMR50410YFQDBVRQ1CT-ND, Arrow Part Number=LMR50410YFQDBVRQ1, Arrow Price/Stock=https://www.arrow.com/en/products/lmr50410yfqdbvrq1/texas-instruments?region=nac, Datasheet Link=https://www.ti.com/product/LMR50410-Q1, Height=1.45mm, Manufacturer_Part_Number=LMR50410YFQDBVRQ1, Mouser Price/Stock=https://www.mouser.co.uk/ProductDetail/Texas-Instruments/LMR50410YFQDBVRQ1?qs=81r%252BiQLm7BRUAgUFqYZycA%3D%3D, Supplier 1=Digi-Key

## Nets (pads, with @x,y where several pads share a name; then routed paths per layer and width w, separated by ;. In a path a pad name is that pad's centre, name@x,y a point inside that pad or via, vN(x,y) a via of type N, cw(c..) or ccw(c..) an arc to the next point about the centre after c; other vN are vias at no path point)
A1: MUX1.4
A2: MUX1.5
A3: MUX1.6
A4: MUX1.7
A5: MUX1.12
A6: MUX1.11
A7: MUX1.10
A8: MUX1.9
B1: MUX2.4
B2: MUX2.5
B3: MUX2.6
B4: MUX2.7
B5: MUX2.12
B6: MUX2.11
B7: MUX2.10
B8: MUX2.9
C1: MUX3.4
C2: MUX3.5
C3: MUX3.6
C4: MUX3.7
C5: MUX3.12
C6: MUX3.11
C7: MUX3.10
C8: MUX3.9
D0: MUX1.1 MUX2.1 MUX3.1 MUX4.1 MUX5.1 MUX6.1 MUX7.1 MUX8.1
D1: MUX1.16 MUX2.16 MUX3.16 MUX4.16 MUX5.16 MUX6.16 MUX7.16 MUX8.16
D2: MUX1.15 MUX2.15 MUX3.15 MUX4.15 MUX5.15 MUX6.15 MUX7.15 MUX8.15
D3: ADC2.6
D4: ADC4.6
D5: ADC6.6
D6: ADC8.6
D7: ADC7.6
D8: ADC5.6
D9: ADC3.6
D10: ADC1.6
E1: MUX4.4
E2: MUX4.5
E3: MUX4.6
E4: MUX4.7
E5: MUX4.12
E6: MUX4.11
E7: MUX4.10
E8: MUX4.9
F1: MUX5.4
F2: MUX5.5
F3: MUX5.6
F4: MUX5.7
F5: MUX5.12
F6: MUX5.11
F7: MUX5.10
F8: MUX5.9
G1: MUX6.4
G2: MUX6.5
G3: MUX6.6
G4: MUX6.7
G5: MUX6.12
G6: MUX6.11
G7: MUX6.10
G8: MUX6.9
GND: ADC1.4 ADC1.5 ADC2.4 ADC2.5 ADC3.4 ADC3.5 ADC4.4 ADC4.5 ADC5.4 ADC5.5 ADC6.4 ADC6.5 ADC7.4 ADC7.5 ADC8.4 ADC8.5 C1.1 C2.1 C3.1 C4.2 C5.1 C6.2 C7.1 C8.1 C9.1 C10.2 C11.1 C12.2 C13.1 C14.1 C15.1 C16.2 C17.1 C18.2 C19.1 C20.1 C21.1 C22.1 C23.2 C24.2 C26.2 C28.1 C30.1 C31.1 C32.1 C33.1 C34.1 C35.1 C36.1 C37.1 C38.1 C39.1 C40.1 C41.1 C42.1 C43.1 C44.1 C45.1 D1.2 J1.1 J1.3 J1.4 LED1.1 MUX1.14 MUX2.14 MUX3.14 MUX4.14 MUX5.14 MUX6.14 MUX7.14 MUX8.14 Q1.1 R2.1 R3.2 R6.2 R9.2 R12.2 R15.2 R18.2 R21.2 R24.2 R27.2 U1.4 U1.5 U2.4 U2.5 U3.4 U3.5 U4.4 U4.5 U5.4 U5.5 U6.4 U6.5 U7.4 U7.5 U8.4 U8.5 VREG1.2
H1: MUX7.4
H2: MUX7.5
H3: MUX7.6
H4: MUX7.7
H5: MUX7.12
H6: MUX7.11
H7: MUX7.10
H8: MUX7.9
I1: MUX8.4
I2: MUX8.5
I3: MUX8.6
I4: MUX8.7
I5: MUX8.12
I6: MUX8.11
I7: MUX8.10
I8: MUX8.9
MISO: ADC1.7 ADC2.7 ADC3.7 ADC4.7 ADC5.7 ADC6.7 ADC7.7 ADC8.7
MOSI: 
NetADC1_1: ADC1.1 ADC2.1 ADC3.1 ADC4.1 ADC5.1 ADC6.1 ADC7.1 ADC8.1 C3.2 C5.2 C9.2 C11.2 C15.2 C17.2 C21.2 C22.2 R5.1 R7.1 R8.1 R10.1 R11.1 R13.1 R14.1 R16.1 R17.1 R19.1 R20.1 R22.1 R23.1 R25.1 R26.1 R28.1 VREF1.1
NetADC1_2: ADC1.2 ADC2.2 ADC3.2 ADC4.2 ADC5.2 ADC6.2 ADC7.2 ADC8.2 C1.2 C6.1 C7.2 C12.1 C13.2 C18.1 C20.2 C23.1 VREF2.1
NetADC1_3: ADC1.3 U1.1 U1.6
NetADC1_9: ADC1.9 ADC1.10 ADC2.9 ADC2.10 ADC3.9 ADC3.10 ADC4.9 ADC4.10 ADC5.9 ADC5.10 ADC6.9 ADC6.10 ADC7.9 ADC7.10 ADC8.9 ADC8.10 C2.2 C4.1 C8.2 C10.1 C14.2 C16.1 C19.2 C24.1 C25.2 C28.2 C29.2 C30.2 C31.2 C32.2 C33.2 C34.2 C35.2 C36.2 C37.2 C38.2 C39.2 C40.2 C41.2 C42.2 C43.2 C44.2 C45.2 L1.2 MUX1.2 MUX1.13 MUX2.2 MUX2.13 MUX3.2 MUX3.13 MUX4.2 MUX4.13 MUX5.2 MUX5.13 MUX6.2 MUX6.13 MUX7.2 MUX7.13 MUX8.2 MUX8.13 R1.2 R4.1 U1.7 U1.8 U2.7 U2.8 U3.7 U3.8 U4.7 U4.8 U5.7 U5.8 U6.7 U6.8 U7.7 U7.8 U8.7 U8.8 VREF1.2 VREF1.3 VREF1.4 VREF1.5 VREF2.4 VREF2.6
NetADC2_3: ADC2.3 U2.1 U2.6
NetADC3_3: ADC3.3 U3.1 U3.6
NetADC4_3: ADC4.3 U4.1 U4.6
NetADC5_3: ADC5.3 U5.1 U5.6
NetADC6_3: ADC6.3 U6.1 U6.6
NetADC7_3: ADC7.3 U7.1 U7.6
NetADC8_3: ADC8.3 U8.1 U8.6
NetC25_1: C25.1 VREF1.6
NetC26_1: C26.1 VREG1.4 VREG1.5
NetC27_1: C27.1 L1.1 VREG1.6
NetC27_2: C27.2 VREG1.1
NetC29_1: C29.1 VREF2.2 VREF2.3 VREF2.5
NetD1_1: D1.1 J1.2 Q1.3
NetLED1_2: LED1.2 R1.1 R2.2
NetMUX1_8: MUX1.8 R7.2 U1.3
NetMUX2_8: MUX2.8 R10.2 U2.3
NetMUX3_8: MUX3.8 R13.2 U3.3
NetMUX4_8: MUX4.8 R16.2 U4.3
NetMUX5_8: MUX5.8 R19.2 U5.3
NetMUX6_8: MUX6.8 R22.2 U6.3
NetMUX7_8: MUX7.8 R25.2 U7.3
NetMUX8_8: MUX8.8 R28.2 U8.3
NetQ1_2: Q1.2
NetR3_1: R3.1 R4.2 VREG1.3
NetR5_2: R5.2 R6.1 U1.2
NetR8_2: R8.2 R9.1 U2.2
NetR11_2: R11.2 R12.1 U3.2
NetR14_2: R14.2 R15.1 U4.2
NetR17_2: R17.2 R18.1 U5.2
NetR20_2: R20.2 R21.1 U6.2
NetR23_2: R23.2 R24.1 U7.2
NetR26_2: R26.2 R27.1 U8.2
SCLK: ADC1.8 ADC2.8 ADC3.8 ADC4.8 ADC5.8 ADC6.8 ADC7.8 ADC8.8
pads on no net: J1.5 MUX1.3 MUX2.3 MUX3.3 MUX4.3 MUX5.3 MUX6.3 MUX7.3 MUX8.3

## Text inside footprints (layer, text, board x,y; h text height)
LED1: Top Overlay "K" at 163.071,100.338 h0.76 r270; Mechanical 15 "K" at 163.071,100.338 h0.76 r270